# Altium PCB Mp100.PcbDoc (part 2 of 2)
Units mil, origin at the board's own origin, x right, y up, seen from the top; angles counter-clockwise.
Board outline 1180 x 2360 mil, 2 copper layers (Top Layer, Bottom Layer); 72 components, 52 nets, 275 pads, 61 vias.
Unrouted connection lines stored in the file: 1.
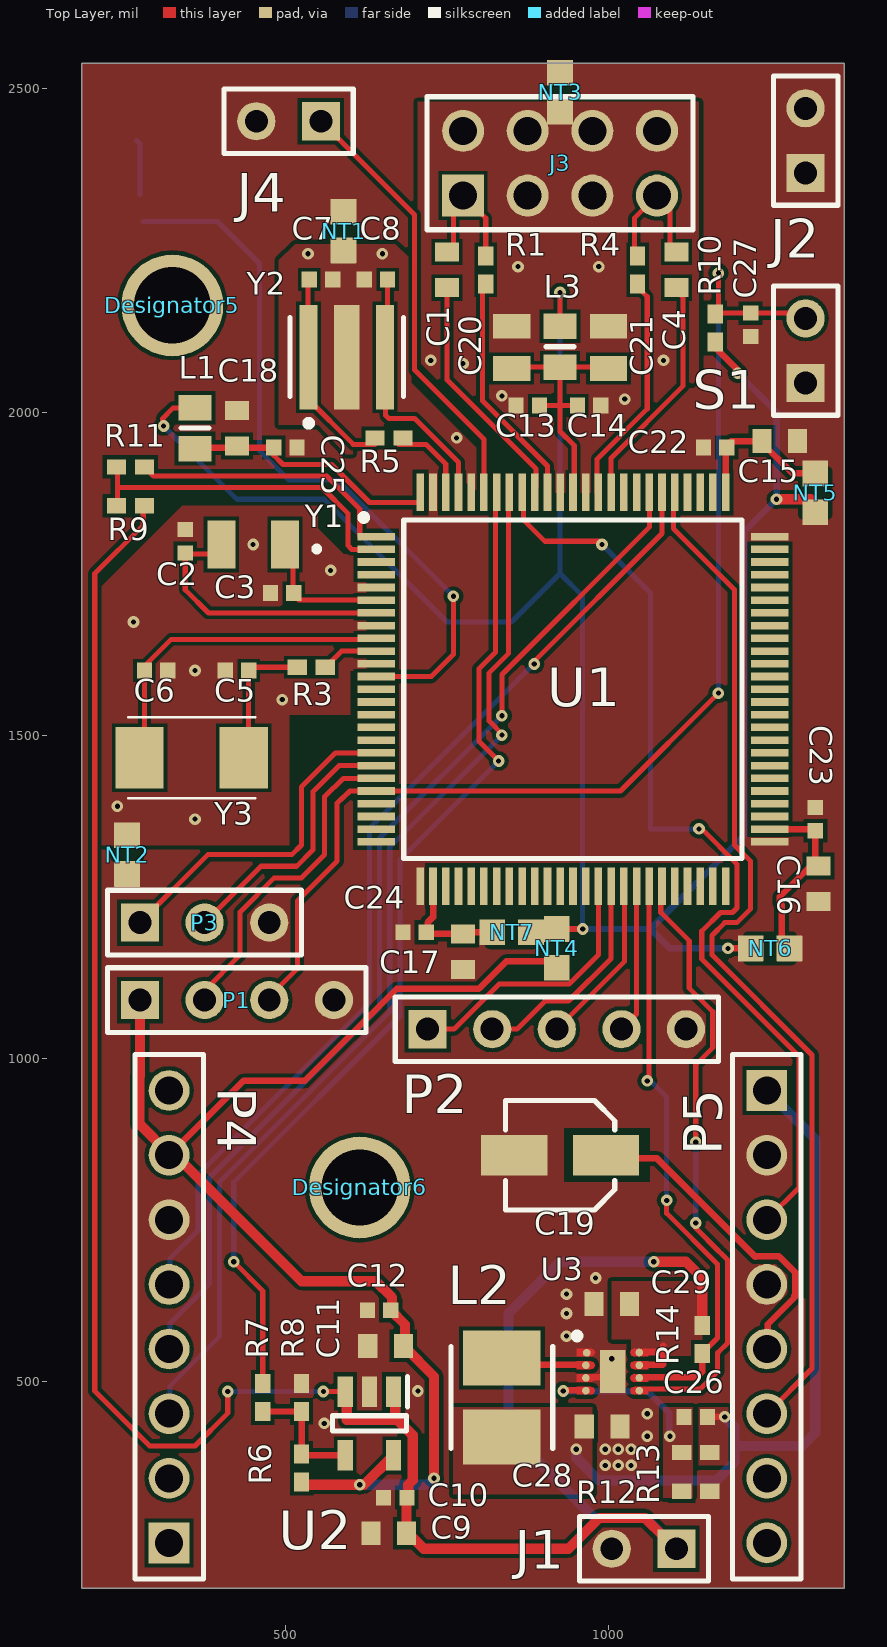
[diagram p0: Top Layer view]

## Polygon pours and split planes (outlines as drawn) (continued)
USS_GND on Bottom Layer "Top Layer-USS_GND" (solid, pour order 55): 1140,2075 1140,2165 1140,2480 705,2480 705,2170 705,2080 873.33,1911.67 878.57,1875 1010,1875 1015,1910 1080,1995
USSXTAL_GND on Bottom Layer "Top Layer-USSXTAL_GND" (solid, pour order 53): 515,2260 670,2260 695,2235 695,2045 795,1945 795,1880 705,1880 630,1880 580,1935 540,1932.36 540,1970 490,1970 490,2235

## Silkscreen, mask and mechanical layers (free items; w line width, h text height)
Bottom Overlay:
  text "AquaSAFE.IO" at 1305,1695 h177.17
  text "MP-100" at 1260,1460 h314.96
Mechanical 1:
  the board outline again, w10